# EAGLE board duckypad (EAGLE 9.6.2)
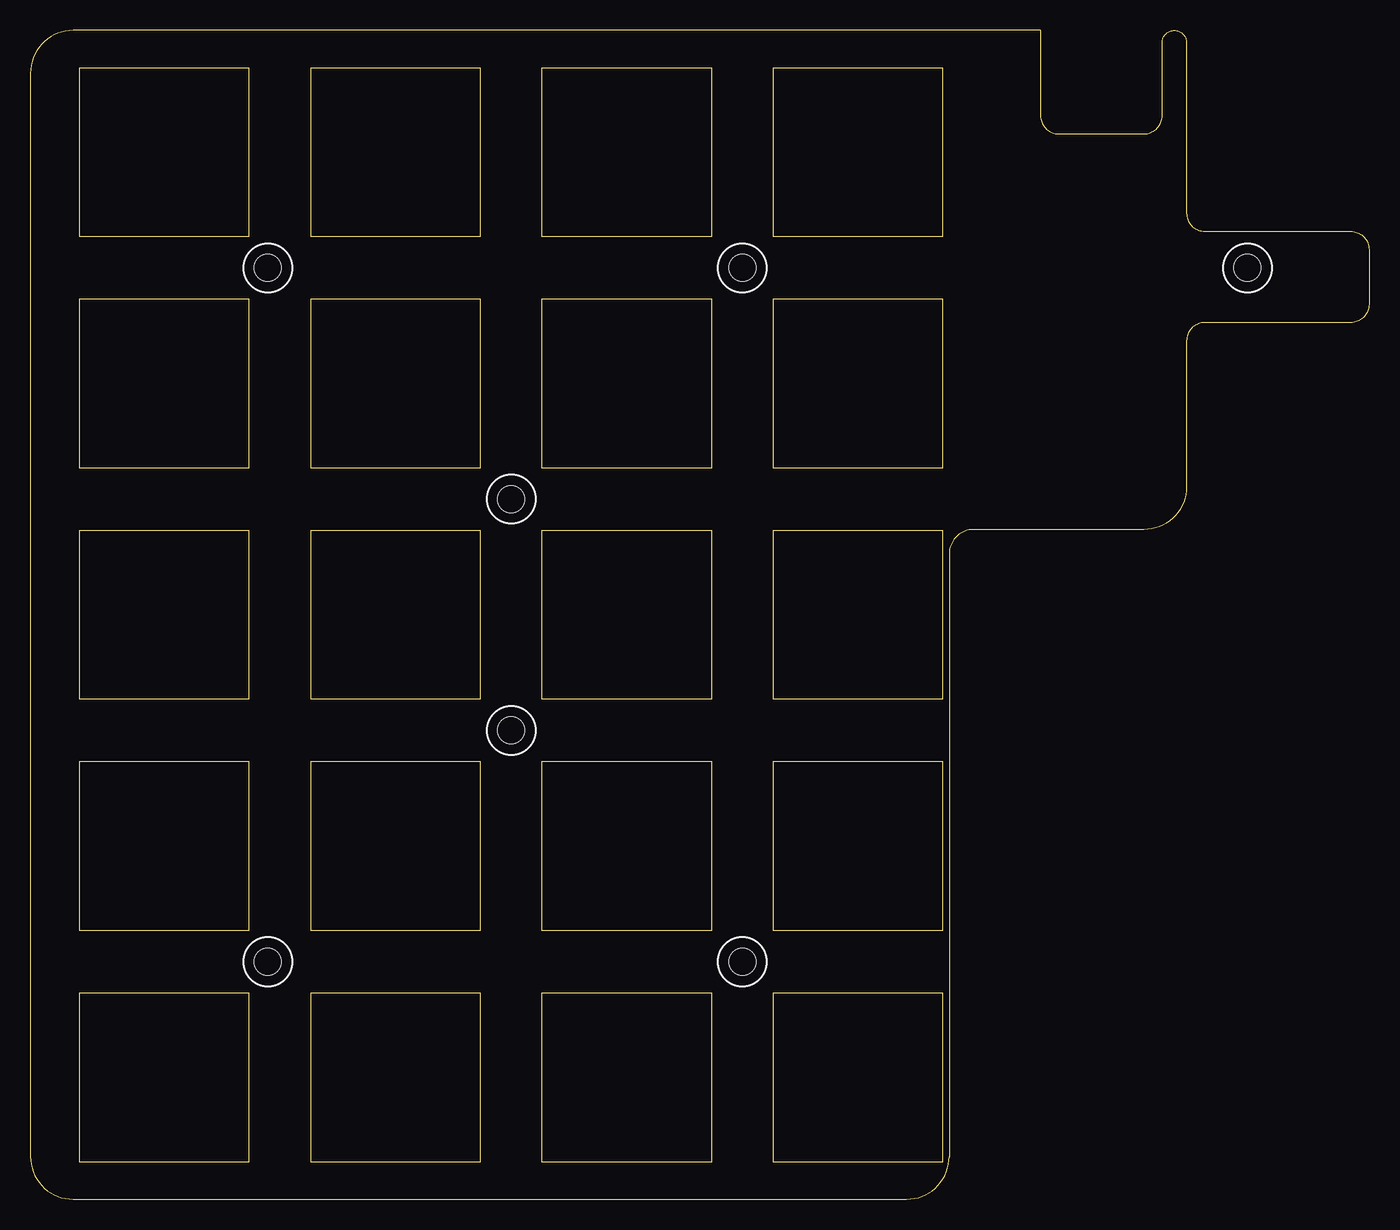
[diagram p0: board, top side]
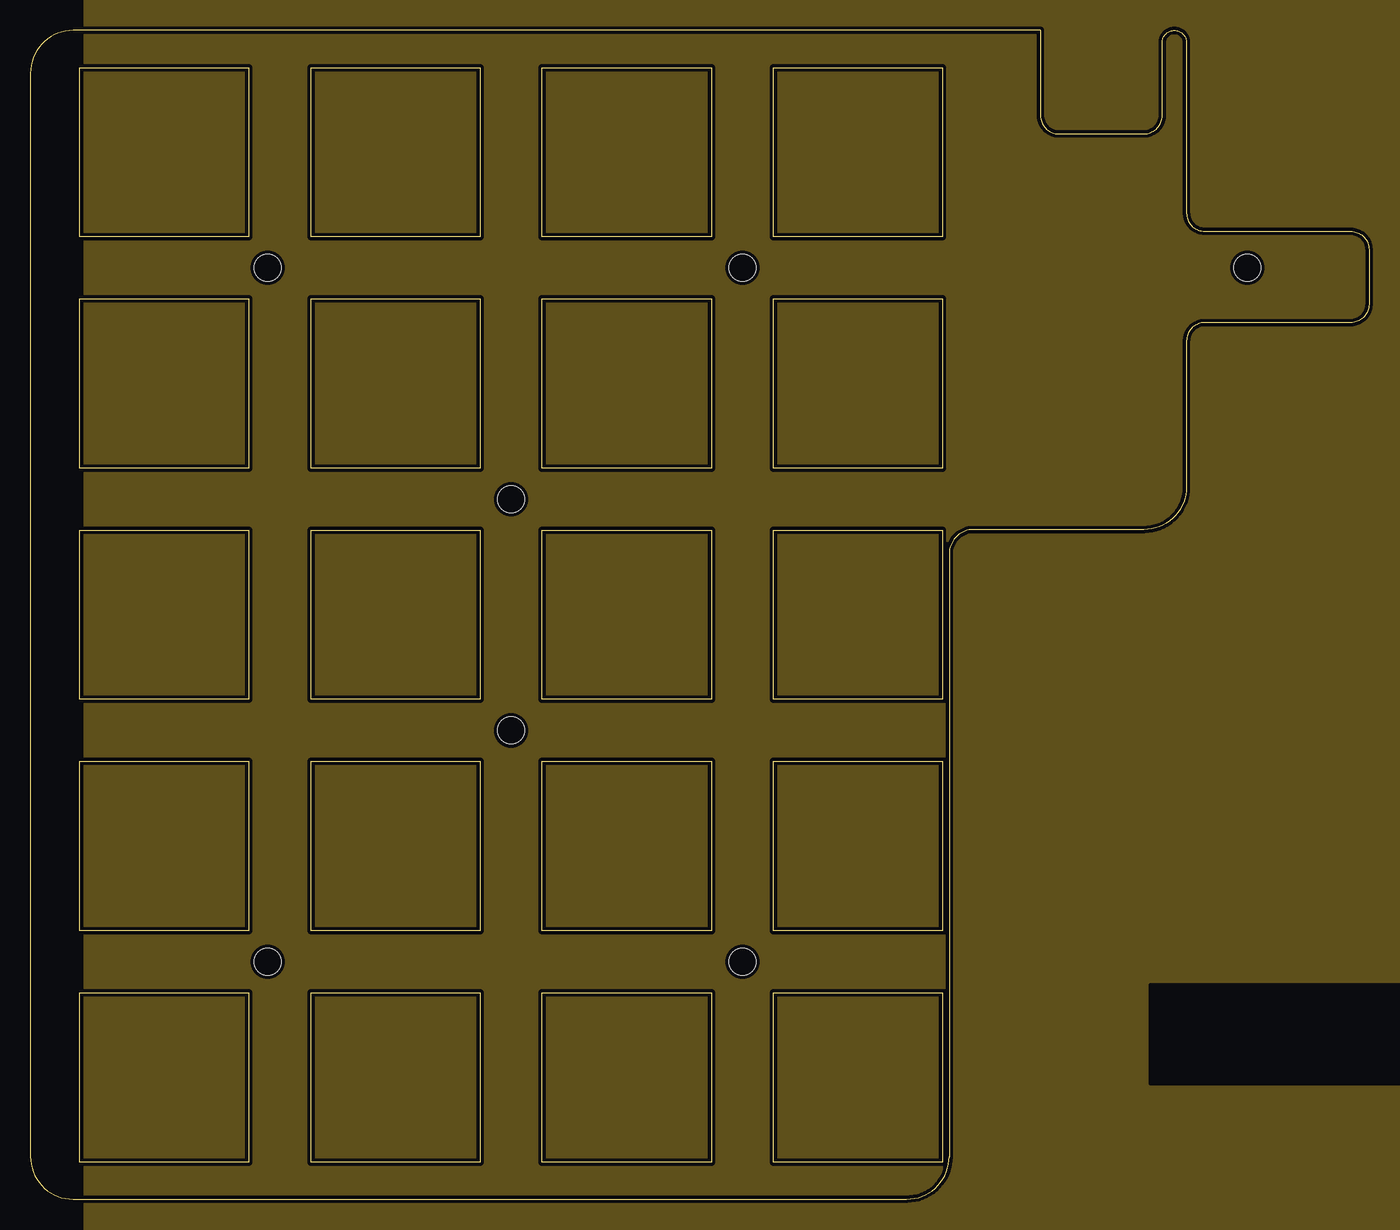
[diagram p1: board, inner layer pwr]
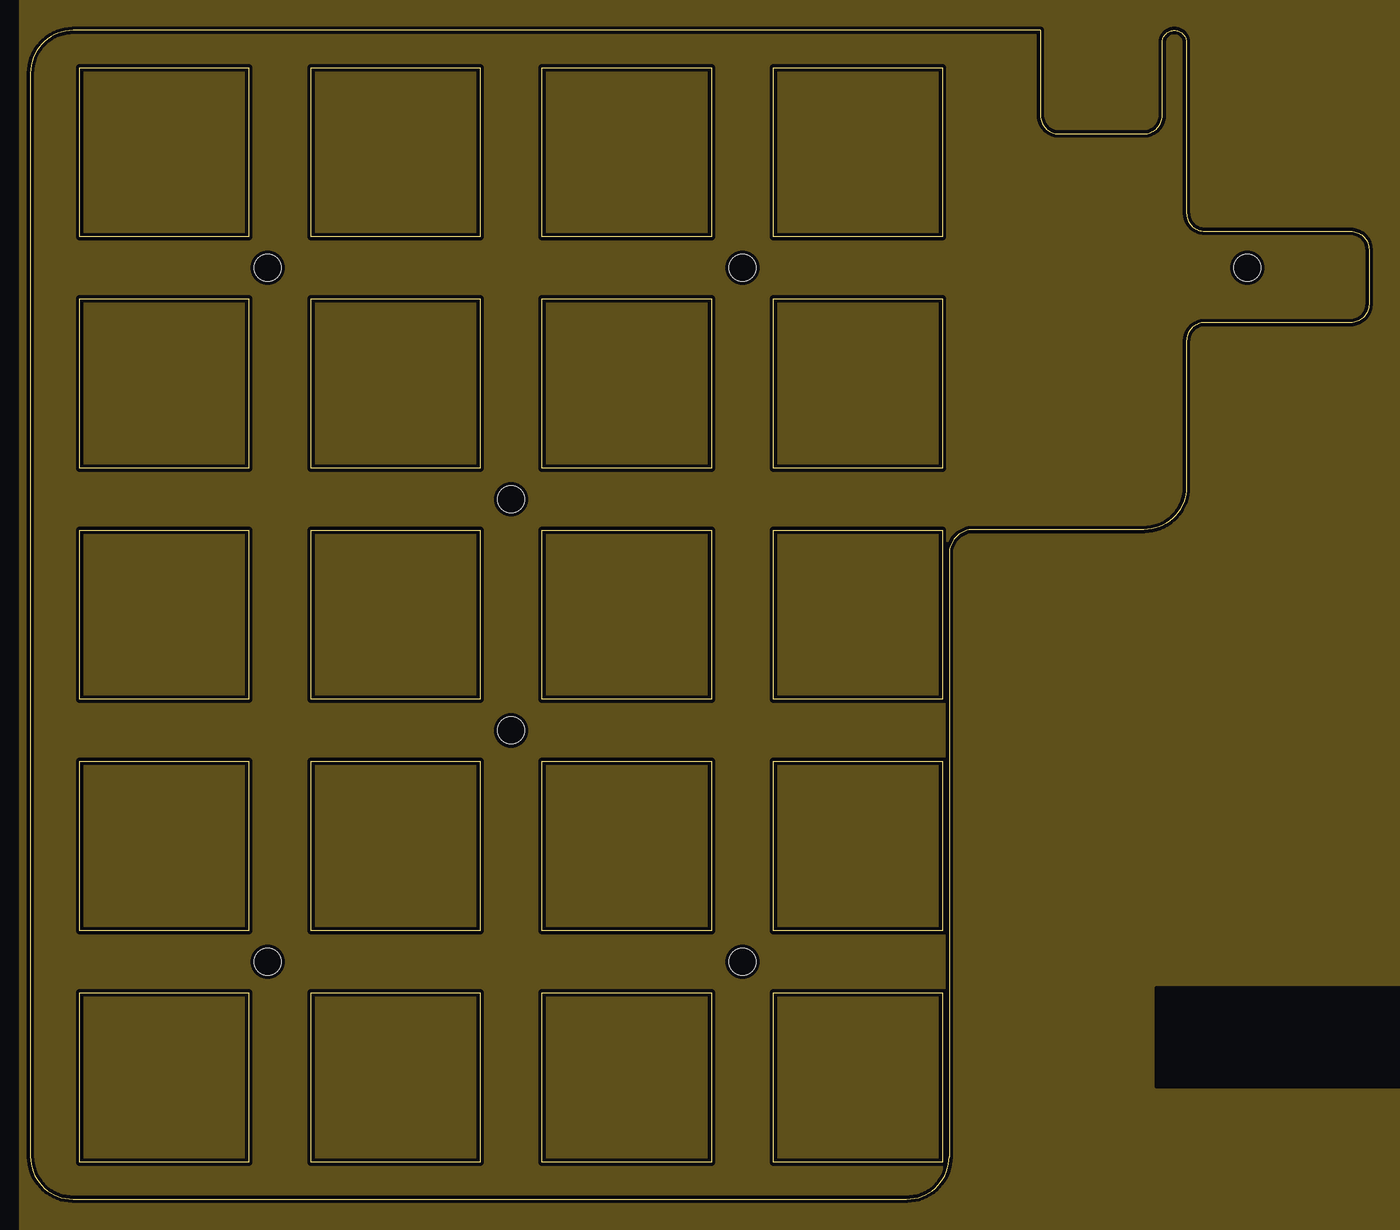
[diagram p2: board, inner layer gnd]
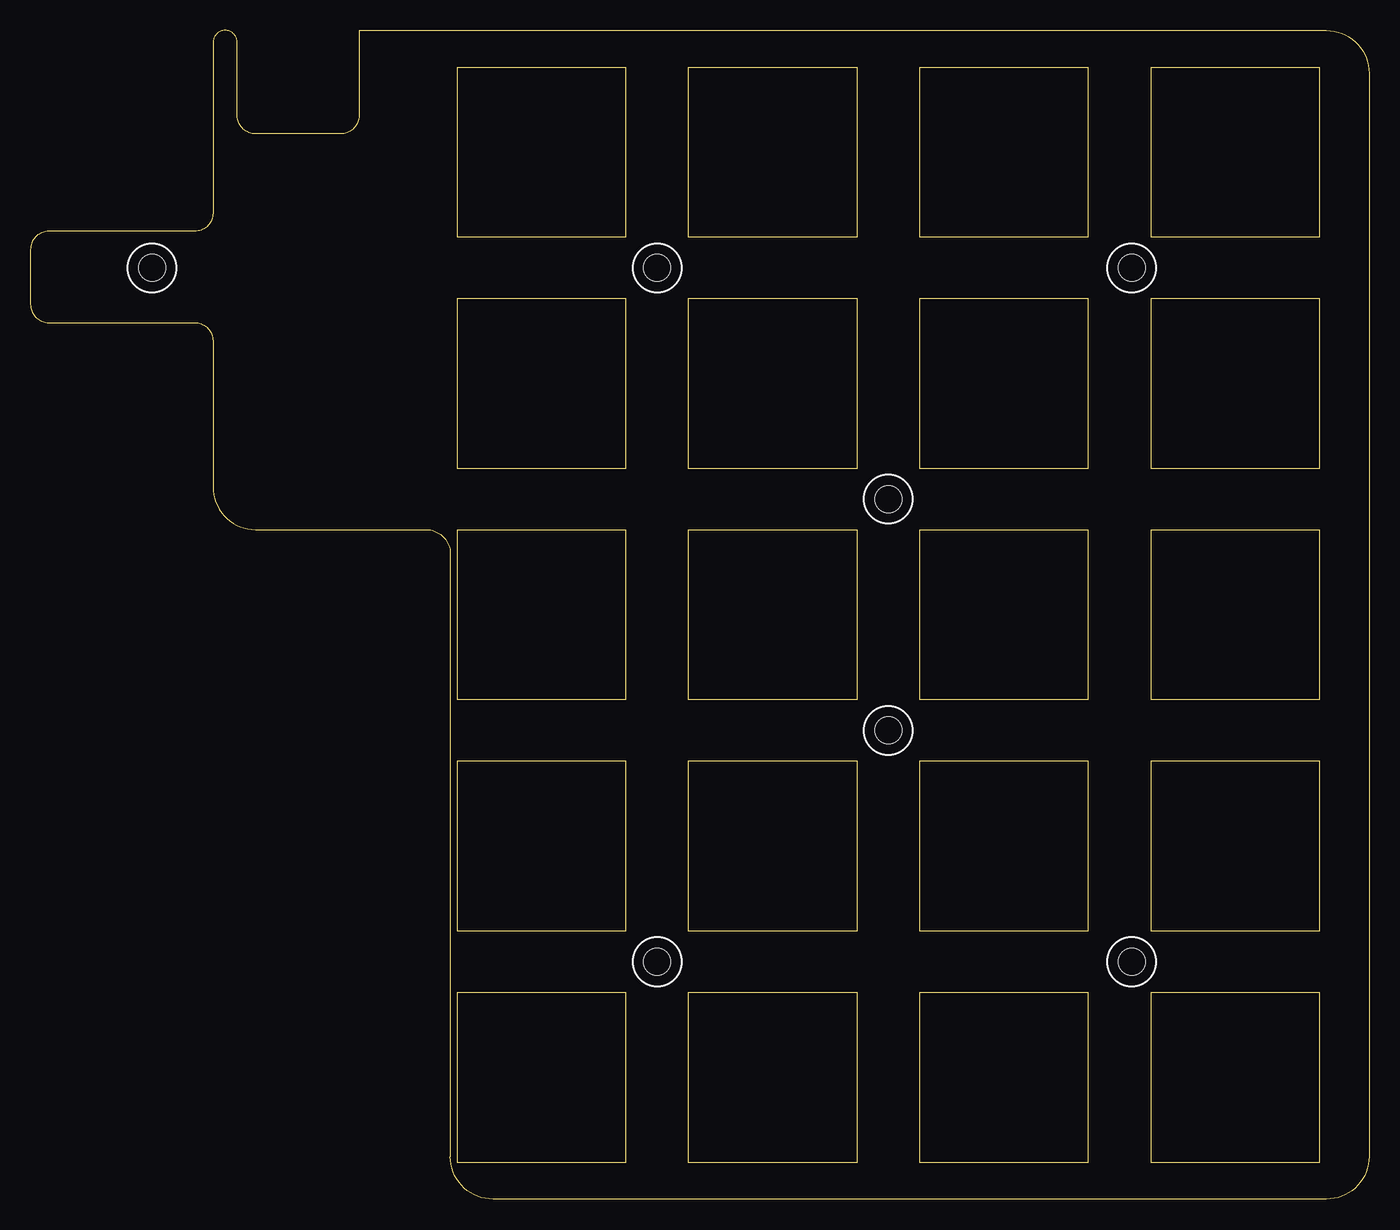
[diagram p3: board, bottom side, seen from below]

Size 110 x 96 mm. Coordinates in mm from the lower left corner, seen from the top.
Outline: 0,92.5 0,3.5 arc90 3.5,0 72,0 arc90 75.5,3.5 75.5,53 arc-90 77.5,55 91.5,55 arc90 95,58.5 95,70.5 arc-90 96.5,72 108.5,72 arc90 110,73.5 110,78 arc90 108.5,79.5 96.5,79.5 arc-90 95,81 95,95 arc90 94,96 arc90 93,95 93,89 arc-90 91.5,87.5 84.5,87.5 arc-90 83,89 83,96 3.5,96 arc90 0,92.5
Copper layers (1+2*15+16): Top 0.035559375mm / dielectric 0.47751875mm / pwr 0.035559375mm / dielectric 0.47751875mm / gnd 0.035559375mm / dielectric 0.47751875mm / Bottom 0.035559375mm
Design rules "SparkFun-4-Layer-General-JLCPCB *": minimum track width 6mil, minimum drill 12mil, track to track 6mil, track to pad 6mil, pad to pad 6mil, via to via 6mil, smd to smd 6mil, copper to edge 6mil, drill to drill 6mil, minimum pad ring 7mil, minimum via ring 7mil, stop-mask expansion 3mil, vias tented up to drill 25mil, thermal gap 10mil

## Footprints (pad centres in the part's own frame; a part is rotated, then mirrored left to right if it is on the bottom)
M2_SCREW_FOOT = hole 2.2: 0,0

## Placement (x,y rotation side)
U$1  SW_OPENM  [SW_OPENING]  11,10 0 top
U$2  SW_OPENM  [SW_OPENING]  30,10 0 top
U$3  SW_OPENM  [SW_OPENING]  49,10 0 top
U$4  SW_OPENM  [SW_OPENING]  68,10 0 top
U$5  SW_OPENM  [SW_OPENING]  11,29 0 top
U$6  SW_OPENM  [SW_OPENING]  30,29 0 top
U$7  SW_OPENM  [SW_OPENING]  49,29 0 top
U$8  M2_SCREW_DEV  [M2_SCREW_FOOT]  39.5,57.5 0 top
U$9  M2_SCREW_DEV  [M2_SCREW_FOOT]  58.5,76.5 0 top
U$10  SW_OPENM  [SW_OPENING]  68,29 0 top
U$11  SW_OPENM  [SW_OPENING]  11,48 0 top
U$12  M2_SCREW_DEV  [M2_SCREW_FOOT]  39.5,38.5 0 top
U$13  M2_SCREW_DEV  [M2_SCREW_FOOT]  58.5,19.5 0 top
U$14  M2_SCREW_DEV  [M2_SCREW_FOOT]  19.5,76.5 0 top
U$15  SW_OPENM  [SW_OPENING]  30,48 0 top
U$16  SW_OPENM  [SW_OPENING]  49,48 0 top
U$17  M2_SCREW_DEV  [M2_SCREW_FOOT]  100,76.5 0 top
U$18  SW_OPENM  [SW_OPENING]  68,48 0 top
U$19  SW_OPENM  [SW_OPENING]  11,67 0 top
U$20  SW_OPENM  [SW_OPENING]  11,86 0 top
U$21  SW_OPENM  [SW_OPENING]  30,67 0 top
U$22  M2_SCREW_DEV  [M2_SCREW_FOOT]  19.5,19.5 0 top
U$23  SW_OPENM  [SW_OPENING]  49,67 0 top
U$24  SW_OPENM  [SW_OPENING]  68,67 0 top
U$25  SW_OPENM  [SW_OPENING]  30,86 0 top
U$26  SW_OPENM  [SW_OPENING]  49,86 0 top
U$27  SW_OPENM  [SW_OPENING]  68,86 0 top

## Library data of the parts
U$1-U$27 = duckypad

## Tracks (layer width: path | path; a pad name or v marks a point on that pad's centre or on a via)
+3V3
  pour pwr (isolate 0.305): 4.52,117.7 138.13,117.7 138.13,-3.08 4.52,-3.08
GND
  pour gnd (isolate 0.305): -0.81,121.38 141.05,121.38 141.05,-6.89 -0.81,-6.89
WTF2
  cutout gnd: 92.53,17.37 120.73,17.37 120.73,9.24 92.53,9.24
  cutout pwr (no thermals): 92.03,17.62 120.73,17.62 120.73,9.49 92.03,9.49